# Altium PCB PCB.PcbDoc
Units mm, origin at the board's own origin, x right, y up, seen from the top; angles counter-clockwise.
Board outline 80 x 60 mm, 2 copper layers (Top Layer, Bottom Layer); 43 components, 32 nets, 172 pads, 9 vias.
Unrouted connection lines stored in the file: 20.
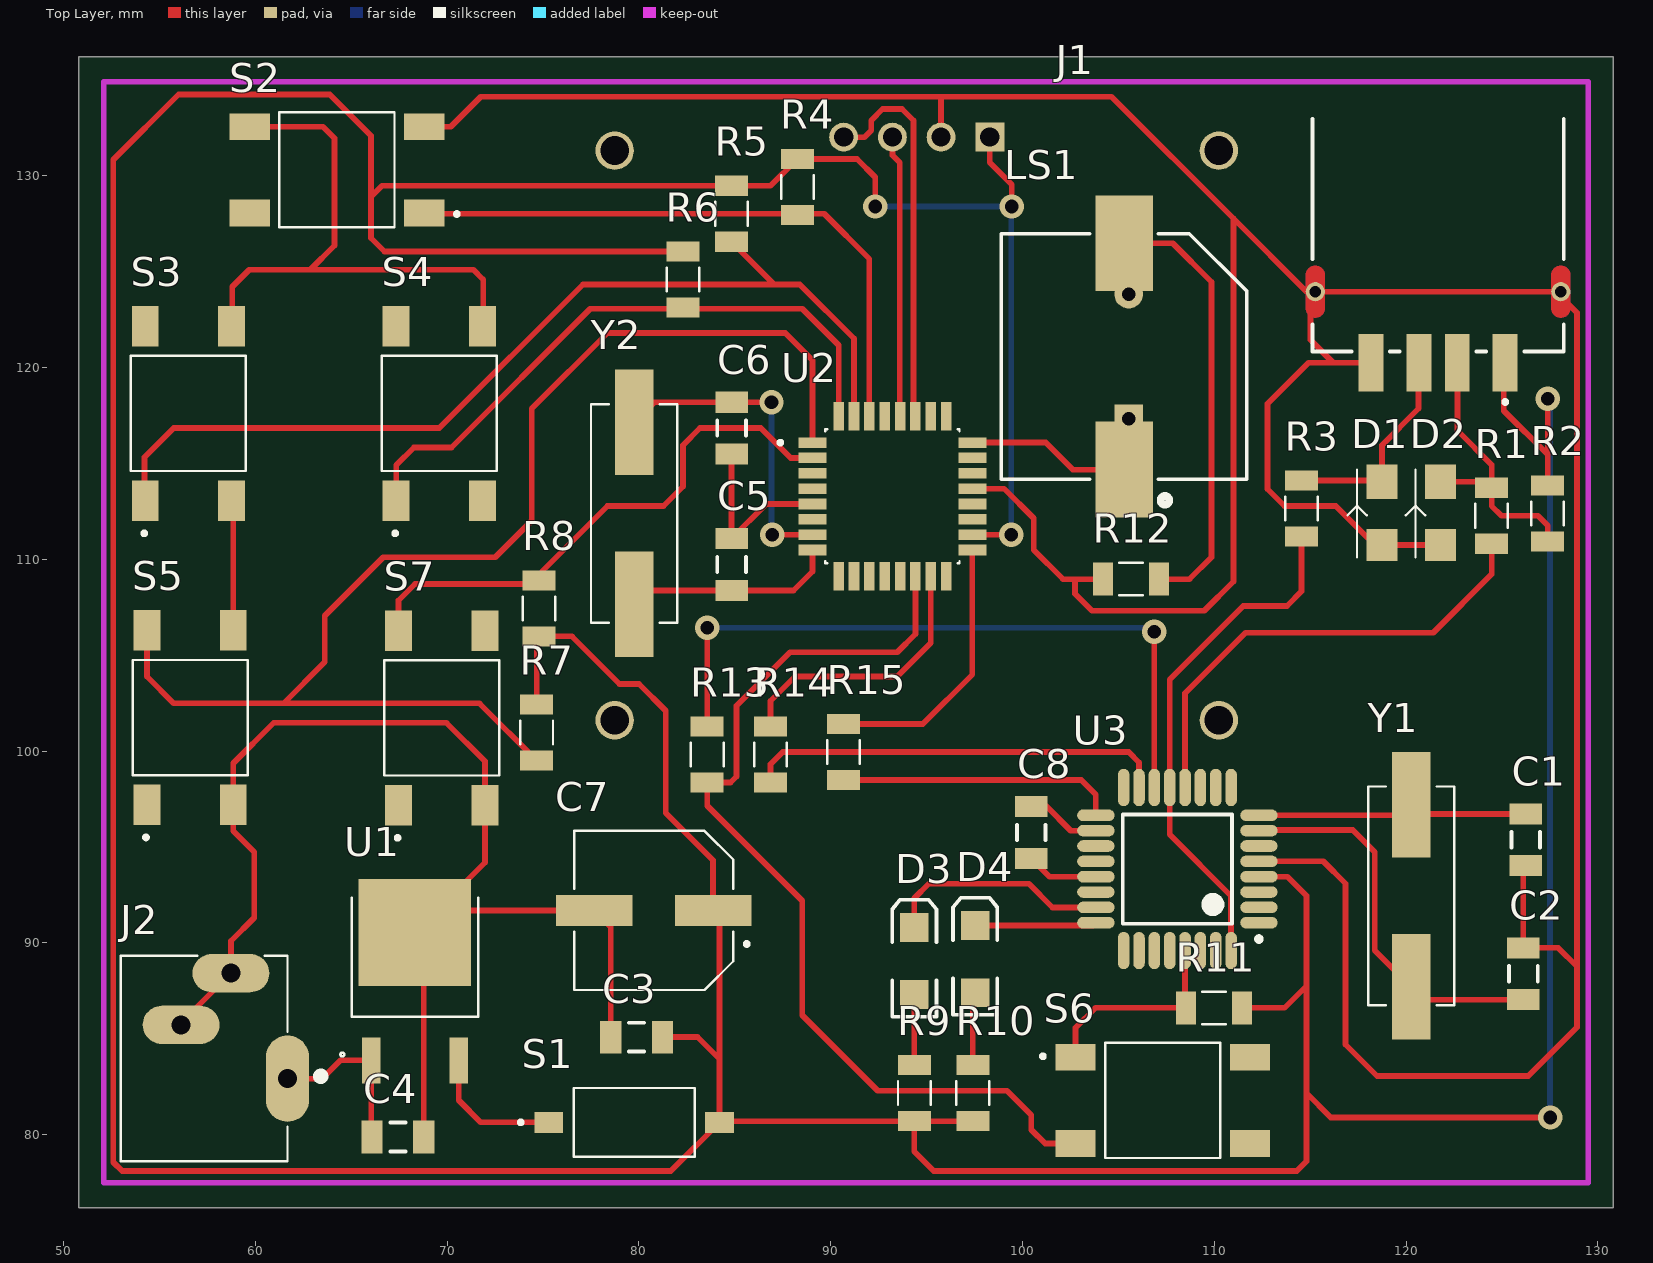
[diagram p0: Top Layer view]
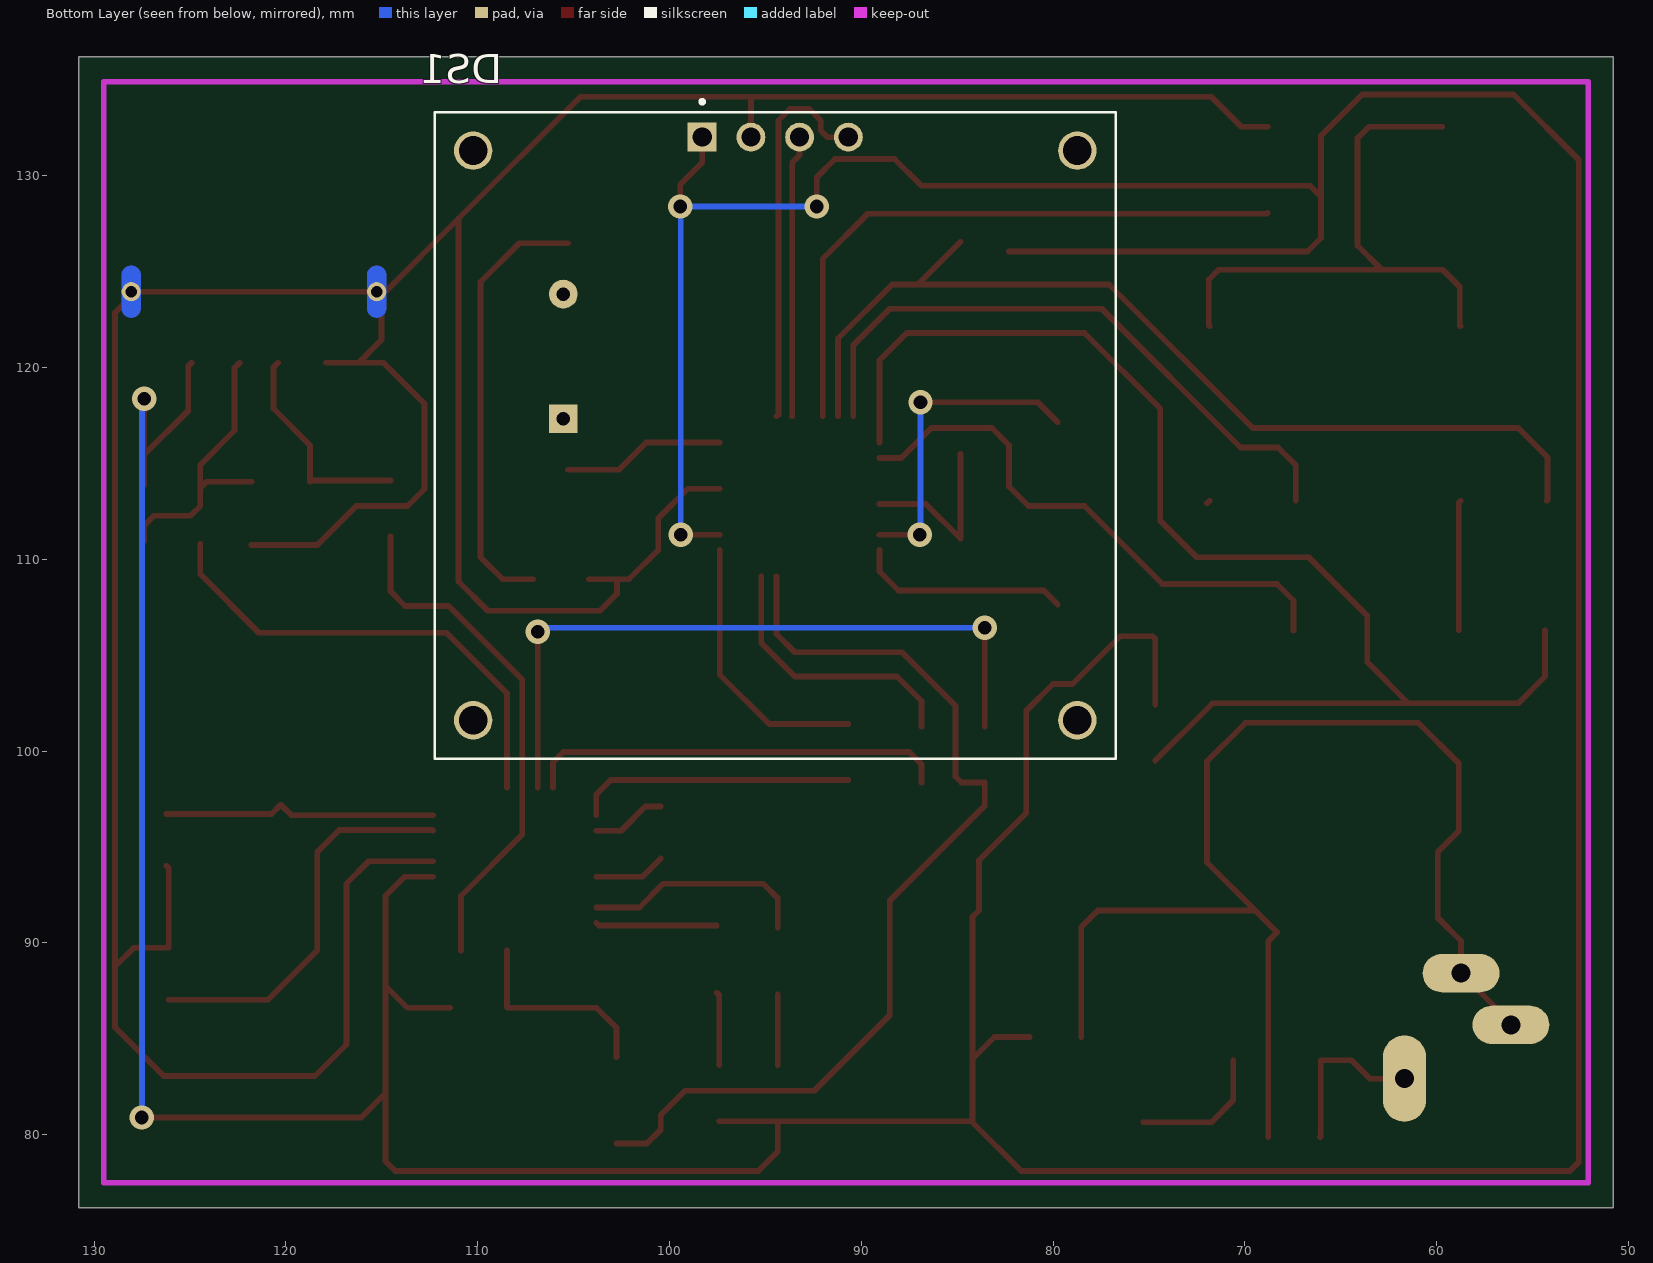
[diagram p1: Bottom Layer view, seen from below]

## Layer stack, top to bottom
Top Solder: solder mask 0.0102, Solder Resist, Dk 3.5
Top Layer: signal copper 0.0356
Dielectric 1: dielectric 0.32, FR-4, Dk 4.8
Bottom Layer: signal copper 0.0356
Bottom Solder: solder mask 0.0102, Solder Resist, Dk 3.5

## Board outline
50.8,76.2 130.8,76.2 130.8,136.2 50.8,136.2

## Design rules (kind name [scope] priority, off if disabled: settings)
Clearance [All] p1: gap=0.2 ignorepadtopadclearanceinfootprint=FALSE
PolygonConnect [All] p1: connectstyle=Relief reliefconductorwidth=0.254 reliefentries=4 polygonreliefangle="90 Angle" airgapwidth=0.254
RoomDefinition Sheet1 [InComponentClass('Components Class 1')] p1: confinementstyle=ConfineIn formatcopy=TRUE lockcomponents=FALSE outline 130.683,136.144 50.927,136.144 50.927,76.2 130.683,76.2
RoutingVias [All] p1: holewidth=0.6 width=1 viastyle="Through Hole" minholewidth=0.711 minwidth=1.27 maxholewidth=0.711 maxwidth=1.27
SolderMaskExpansion [All] p1: expansion=0.102
Width [All] p1: maxlimit=0.3 minlimit=0.3 preferedwidth=0.3
30 further rules are at their usual default settings.

## Classes and differential pairs
component class Sheet1: C1 C2 C3 C4 C5 C6 C7 C8 D1 D2 D3 D4 J1 R1 R2 R3 R4 R5 R6 R7 R8 R9 R10 R11 R13 R14 R15 S1 S2 S3 S4 S5 S6 S7 U2 U3 U? Y1 Y2

## Components (designator, comment, footprint, x,y, rotation, side; value= is the part's Value field where it differs from the comment)
C1 "Cap Semi" C1206 126.238,95.377 r90 top value=22pF
C2 "Cap Semi" C1206 126.111,88.392 r270 top value=22pF
C3 "Cap Semi" C1206 79.883,85.09 r0 top value=0.1uF
C4 "Cap Semi" C1206 67.437,79.883 r180 top value=0.33uF
C5 "Cap Semi" C1206 84.836,109.728 r270 top value=22pF
C6 "Cap Semi" C1206 84.836,116.84 r90 top value=22pF
C7 "EEEFK1J220L" *CAP_EEEFK1J220L 80.772,91.694 r180 top value=4.7uF
C8 "Cap Semi" C1206 100.457,95.758 r90 top value=100nF
D1 "MMSZ3V3T1G" *MMSZ5V6T1G_MMSZ3V3T1G(Primary) 118.745,112.395 r270 top value=3V6
D2 "MMSZ3V3T1G" *MMSZ5V6T1G_MMSZ3V3T1G(Primary) 121.793,112.394 r270 top value=3V6
D3 "LED2" 3.2X1.6X1.1 94.361,89.055 r90 top
D4 "LED2" 3.2X1.6X1.1 97.536,89.154 r90 top
DS1 "OLED_128X64_1.3_I2C" *LCD_OLED_128X64_1.3_I2C 94.488,116.459 r180 bottom
J1 "USB" *GCT_USB1046-GF-0190-L-B-A_REVB4_USB1046-GF-0190-L-B-A_REVB4(Primary) 121.666,123.952 r180 top
J2 "PJ-006A" *CUI_PJ-006A 61.684,82.925 r270 top
LS1 "Buzzer" ABSM-1574 105.297,114.675 r90 top
R1 "1-2176343-4" *RESC3115X65N 124.46,112.268 r90 top value=68
R2 "1-2176343-4" *RESC3115X65N 127.381,112.395 r90 top value=2K2
R3 "1-2176343-4" *RESC3115X65N 114.554,112.649 r90 top value=68
R4 "1-2176343-4" *RESC3115X65N 88.265,129.413 r270 top value=10K
R5 "1-2176343-4" *RESC3115X65N 84.836,128.016 r270 top value=10K
R6 "1-2176343-4" *RESC3115X65N 82.296,124.587 r270 top value=10K
R7 "1-2176343-4" *RESC3115X65N 74.676,100.965 r270 top value=10K
R8 "1-2176343-4" *RESC3115X65N 74.803,107.442 r90 top value=10K
R9 "1-2176343-4" *RESC3115X65N 94.361,82.169 r270 top value=10K
R10 "1-2176343-4" *RESC3115X65N 97.409,82.169 r270 top value=10K
R11 "1-2176343-4" *RESC3115X65N 109.982,86.614 r0 top value=10K
R12 "1-2176343-4" *RESC3115X65N 105.664,108.966 r0 top value=10K
R13 "1-2176343-4" *RESC3115X65N 83.566,99.822 r270 top value=10K
R14 "1-2176343-4" *RESC3115X65N 86.868,99.822 r90 top value=10K
R15 "1-2176343-4" *RESC3115X65N 90.678,99.949 r90 top value=10K
S1 "KAE01SGGT" *SW_KAE01SGGT 79.756,80.645 r0 top
S2 "3-1437565-0" *SW_3-1437565-0 64.262,130.302 r180 top
S3 "3-1437565-0" *SW_3-1437565-0 56.515,117.602 r90 top
S4 "3-1437565-0" *SW_3-1437565-0 69.596,117.602 r90 top
S5 "3-1437565-0" *SW_3-1437565-0 56.606,101.749 r90 top
S6 "3-1437565-0" *SW_3-1437565-0 107.315,81.788 r0 top
S7 "3-1437565-0" *SW_3-1437565-0 69.723,101.727 r90 top
U1 "L7805CDT" *VREG_L7805CDT 68.326,88.081 r0 top
U2 "ATMEGA328P-AU" *QFP80P900X900X120-32N 93.218,113.284 r0 top
U3 "ATmega8-16AU" 32A_M 108.077,93.853 r180 top
Y1 "CRYSTAL" *XTAL_CAA-12.000-20-3050-X-R 120.269,92.456 r270 top value=12MHz
Y2 "CRYSTAL" *XTAL_CAA-12.000-20-3050-X-R 79.756,112.395 r90 top value=12MHz

## Footprints (in the part's own frame and the unit in brackets; to place one, negate y for a bottom-side part, rotate by r counter-clockwise, add the part's x,y. Pads: shape width x height; smd on the part's side, far side on the other; paste and mask are expansions set on the pad)
3.2X1.6X1.1 [mm] "SMT LED; 2 Flat Leads"
  rect 1.5x1.5 smd: 1(-1.75,0) 2(1.75,0)
  silkscreen extent -2.9,-1.15 3.2,1.15
32A_M [mm] "Thin QFP, 32-Leads, Body 7x7mm, Pitch 0.8mm, IPC Low Density"
  oval 1.95x0.6 smd: 1(-4.25,2.8) 2(-4.25,2) 3(-4.25,1.2) 4(-4.25,0.4) 5(-4.25,-0.4) 6(-4.25,-1.2) 7(-4.25,-2) 8(-4.25,-2.8) 17(4.25,-2.8) 18(4.25,-2) 19(4.25,-1.2) 20(4.25,-0.4) 21(4.25,0.4) 22(4.25,1.2) 23(4.25,2) 24(4.25,2.8)
  oval 0.6x1.95 smd: 9(-2.8,-4.25) 10(-2,-4.25) 11(-1.2,-4.25) 12(-0.4,-4.25) 13(0.4,-4.25) 14(1.2,-4.25) 15(2,-4.25) 16(2.8,-4.25) 25(2.8,4.25) 26(2,4.25) 27(1.2,4.25) 28(0.4,4.25) 29(-0.4,4.25) 30(-1.2,4.25) 31(-2,4.25) 32(-2.8,4.25)
  silkscreen extent -4.38,-2.85 2.85,3.77, body extent -3.5,-3.5 3.5,3.5, height 1.2
*CAP_EEEFK1J220L [mm]
  rect 4x1.6 smd: 1(-3.1,0) 2(3.1,0)
  silkscreen extent -4.95,-4.15 4.15,4.15
*CUI_PJ-006A [mm]
  oval 4.5x2.25 hole 1: 1(0,0)
  oval 2x4 hole 1: 2(-5.5,-2.95) 3(-2.8,-5.55)
  silkscreen extent -6.4,-8.7 4.3,1.93
*GCT_USB1046-GF-0190-L-B-A_REVB4_USB1046-GF-0190-L-B-A_REVB4(Primary) [mm]
  rect 1.3x3 smd: 1(-3.5,3.7) 2(-1,3.7) 3(1,3.7) 4(3.5,3.7)
  round 1 hole 0.6: SH1(-6.4,0) SH2(6.4,0)
  Top Layer region: 6.9,0.85 6.9,-0.85 6.899,-0.876 6.897,-0.902 6.894,-0.928 6.889,-0.954 6.883,-0.979 6.876,-1.005 6.867,-1.029 6.857,-1.053 6.846,-1.077 6.833,-1.1 6.819,-1.122 6.805,-1.144 6.789,-1.165 6.772,-1.185 6.754,-1.204 6.735,-1.222 6.715,-1.239 6.694,-1.255 6.672,-1.269 6.65,-1.283 6.627,-1.295 6.603,-1.307 6.579,-1.317 6.555,-1.326 6.529,-1.333 6.504,-1.339 6.478,-1.344 6.452,-1.347 6.426,-1.349 6.4,-1.35 6.374,-1.349 6.348,-1.347 6.322,-1.344 6.296,-1.339 6.271,-1.333 6.245,-1.326 6.221,-1.317 6.197,-1.307 6.173,-1.295 6.15,-1.283 6.128,-1.269 6.106,-1.255 6.085,-1.239 6.065,-1.222 6.046,-1.204 6.028,-1.185 6.011,-1.165 5.995,-1.144 5.981,-1.122 5.967,-1.1 5.954,-1.077 5.943,-1.053 5.933,-1.029 5.924,-1.005 5.917,-0.979 5.911,-0.954 5.906,-0.928 5.903,-0.902 5.901,-0.876 5.9,-0.85 5.9,0.85 5.901,0.876 5.903,0.902 5.906,0.928 5.911,0.954 5.917,0.979 5.924,1.005 5.933,1.029 5.943,1.053 5.954,1.077 5.967,1.1 5.981,1.122 5.995,1.144 6.011,1.165 6.028,1.185 6.046,1.204 6.065,1.222 6.085,1.239 6.106,1.255 6.128,1.269 6.15,1.283 6.173,1.295 6.197,1.307 6.221,1.317 6.245,1.326 6.271,1.333 6.296,1.339 6.322,1.344 6.348,1.347 6.374,1.349 6.4,1.35 6.426,1.349 6.452,1.347 6.478,1.344 6.504,1.339 6.529,1.333 6.555,1.326 6.579,1.317 6.603,1.307 6.627,1.295 6.65,1.283 6.672,1.269 6.694,1.255 6.715,1.239 6.735,1.222 6.754,1.204 6.772,1.185 6.789,1.165 6.805,1.144 6.819,1.122 6.833,1.1 6.846,1.077 6.857,1.053 6.867,1.029 6.876,1.005 6.883,0.979 6.889,0.954 6.894,0.928 6.897,0.902 6.899,0.876 6.9,0.85
  Top Layer region: -5.9,0.85 -5.9,-0.85 -5.901,-0.876 -5.903,-0.902 -5.906,-0.928 -5.911,-0.954 -5.917,-0.979 -5.924,-1.005 -5.933,-1.029 -5.943,-1.053 -5.954,-1.077 -5.967,-1.1 -5.981,-1.122 -5.995,-1.144 -6.011,-1.165 -6.028,-1.185 -6.046,-1.204 -6.065,-1.222 -6.085,-1.239 -6.106,-1.255 -6.128,-1.269 -6.15,-1.283 -6.173,-1.295 -6.197,-1.307 -6.221,-1.317 -6.245,-1.326 -6.271,-1.333 -6.296,-1.339 -6.322,-1.344 -6.348,-1.347 -6.374,-1.349 -6.4,-1.35 -6.426,-1.349 -6.452,-1.347 -6.478,-1.344 -6.504,-1.339 -6.529,-1.333 -6.555,-1.326 -6.579,-1.317 -6.603,-1.307 -6.627,-1.295 -6.65,-1.283 -6.672,-1.269 -6.694,-1.255 -6.715,-1.239 -6.735,-1.222 -6.754,-1.204 -6.772,-1.185 -6.789,-1.165 -6.805,-1.144 -6.819,-1.122 -6.833,-1.1 -6.846,-1.077 -6.857,-1.053 -6.867,-1.029 -6.876,-1.005 -6.883,-0.979 -6.889,-0.954 -6.894,-0.928 -6.897,-0.902 -6.899,-0.876 -6.9,-0.85 -6.9,0.85 -6.899,0.876 -6.897,0.902 -6.894,0.928 -6.889,0.954 -6.883,0.979 -6.876,1.005 -6.867,1.029 -6.857,1.053 -6.846,1.077 -6.833,1.1 -6.819,1.122 -6.805,1.144 -6.789,1.165 -6.772,1.185 -6.754,1.204 -6.735,1.222 -6.715,1.239 -6.694,1.255 -6.672,1.269 -6.65,1.283 -6.627,1.295 -6.603,1.307 -6.579,1.317 -6.555,1.326 -6.529,1.333 -6.504,1.339 -6.478,1.344 -6.452,1.347 -6.426,1.349 -6.4,1.35 -6.374,1.349 -6.348,1.347 -6.322,1.344 -6.296,1.339 -6.271,1.333 -6.245,1.326 -6.221,1.317 -6.197,1.307 -6.173,1.295 -6.15,1.283 -6.128,1.269 -6.106,1.255 -6.085,1.239 -6.065,1.222 -6.046,1.204 -6.028,1.185 -6.011,1.165 -5.995,1.144 -5.981,1.122 -5.967,1.1 -5.954,1.077 -5.943,1.053 -5.933,1.029 -5.924,1.005 -5.917,0.979 -5.911,0.954 -5.906,0.928 -5.903,0.902 -5.901,0.876 -5.9,0.85
  Bottom Layer region: 5.9,0.85 5.9,-0.85 5.901,-0.876 5.903,-0.902 5.906,-0.928 5.911,-0.954 5.917,-0.979 5.924,-1.005 5.933,-1.029 5.943,-1.053 5.954,-1.077 5.967,-1.1 5.981,-1.122 5.995,-1.144 6.011,-1.165 6.028,-1.185 6.046,-1.204 6.065,-1.222 6.085,-1.239 6.106,-1.255 6.128,-1.269 6.15,-1.283 6.173,-1.295 6.197,-1.307 6.221,-1.317 6.245,-1.326 6.271,-1.333 6.296,-1.339 6.322,-1.344 6.348,-1.347 6.374,-1.349 6.4,-1.35 6.426,-1.349 6.452,-1.347 6.478,-1.344 6.504,-1.339 6.529,-1.333 6.555,-1.326 6.579,-1.317 6.603,-1.307 6.627,-1.295 6.65,-1.283 6.672,-1.269 6.694,-1.255 6.715,-1.239 6.735,-1.222 6.754,-1.204 6.772,-1.185 6.789,-1.165 6.805,-1.144 6.819,-1.122 6.833,-1.1 6.846,-1.077 6.857,-1.053 6.867,-1.029 6.876,-1.005 6.883,-0.979 6.889,-0.954 6.894,-0.928 6.897,-0.902 6.899,-0.876 6.9,-0.85 6.9,0.85 6.899,0.876 6.897,0.902 6.894,0.928 6.889,0.954 6.883,0.979 6.876,1.005 6.867,1.029 6.857,1.053 6.846,1.077 6.833,1.1 6.819,1.122 6.805,1.144 6.789,1.165 6.772,1.185 6.754,1.204 6.735,1.222 6.715,1.239 6.694,1.255 6.672,1.269 6.65,1.283 6.627,1.295 6.603,1.307 6.579,1.317 6.555,1.326 6.529,1.333 6.504,1.339 6.478,1.344 6.452,1.347 6.426,1.349 6.4,1.35 6.374,1.349 6.348,1.347 6.322,1.344 6.296,1.339 6.271,1.333 6.245,1.326 6.221,1.317 6.197,1.307 6.173,1.295 6.15,1.283 6.128,1.269 6.106,1.255 6.085,1.239 6.065,1.222 6.046,1.204 6.028,1.185 6.011,1.165 5.995,1.144 5.981,1.122 5.967,1.1 5.954,1.077 5.943,1.053 5.933,1.029 5.924,1.005 5.917,0.979 5.911,0.954 5.906,0.928 5.903,0.902 5.901,0.876 5.9,0.85
  Bottom Layer region: -6.9,0.85 -6.9,-0.85 -6.899,-0.876 -6.897,-0.902 -6.894,-0.928 -6.889,-0.954 -6.883,-0.979 -6.876,-1.005 -6.867,-1.029 -6.857,-1.053 -6.846,-1.077 -6.833,-1.1 -6.819,-1.122 -6.805,-1.144 -6.789,-1.165 -6.772,-1.185 -6.754,-1.204 -6.735,-1.222 -6.715,-1.239 -6.694,-1.255 -6.672,-1.269 -6.65,-1.283 -6.627,-1.295 -6.603,-1.307 -6.579,-1.317 -6.555,-1.326 -6.529,-1.333 -6.504,-1.339 -6.478,-1.344 -6.452,-1.347 -6.426,-1.349 -6.4,-1.35 -6.374,-1.349 -6.348,-1.347 -6.322,-1.344 -6.296,-1.339 -6.271,-1.333 -6.245,-1.326 -6.221,-1.317 -6.197,-1.307 -6.173,-1.295 -6.15,-1.283 -6.128,-1.269 -6.106,-1.255 -6.085,-1.239 -6.065,-1.222 -6.046,-1.204 -6.028,-1.185 -6.011,-1.165 -5.995,-1.144 -5.981,-1.122 -5.967,-1.1 -5.954,-1.077 -5.943,-1.053 -5.933,-1.029 -5.924,-1.005 -5.917,-0.979 -5.911,-0.954 -5.906,-0.928 -5.903,-0.902 -5.901,-0.876 -5.9,-0.85 -5.9,0.85 -5.901,0.876 -5.903,0.902 -5.906,0.928 -5.911,0.954 -5.917,0.979 -5.924,1.005 -5.933,1.029 -5.943,1.053 -5.954,1.077 -5.967,1.1 -5.981,1.122 -5.995,1.144 -6.011,1.165 -6.028,1.185 -6.046,1.204 -6.065,1.222 -6.085,1.239 -6.106,1.255 -6.128,1.269 -6.15,1.283 -6.173,1.295 -6.197,1.307 -6.221,1.317 -6.245,1.326 -6.271,1.333 -6.296,1.339 -6.322,1.344 -6.348,1.347 -6.374,1.349 -6.4,1.35 -6.426,1.349 -6.452,1.347 -6.478,1.344 -6.504,1.339 -6.529,1.333 -6.555,1.326 -6.579,1.317 -6.603,1.307 -6.627,1.295 -6.65,1.283 -6.672,1.269 -6.694,1.255 -6.715,1.239 -6.735,1.222 -6.754,1.204 -6.772,1.185 -6.789,1.165 -6.805,1.144 -6.819,1.122 -6.833,1.1 -6.846,1.077 -6.857,1.053 -6.867,1.029 -6.876,1.005 -6.883,0.979 -6.889,0.954 -6.894,0.928 -6.897,0.902 -6.899,0.876 -6.9,0.85
  silkscreen extent -6.55,-9 6.55,5.85
*LCD_OLED_128X64_1.3_I2C [mm]
  rect 1.508x1.508 hole 1: 1(-3.81,15.55)
  round 1.508 hole 1: 2(-1.27,15.55) 3(1.27,15.55) 4(3.81,15.55)
  round 2 hole 1.5 unplated: None(-15.75,-14.85) None(-15.75,14.85) None(15.75,-14.85) None(15.75,14.85)
  silkscreen extent -17.75,-16.85 17.75,17.5
*MMSZ5V6T1G_MMSZ3V3T1G(Primary) [mm]
  rect 1.68x1.6 smd: A(1.65,0)
  rect 1.8x1.6 smd: K(-1.65,0)
  silkscreen extent -2.3,-1.8 2.3,-0.8
*QFP80P900X900X120-32N [mm]
  rect 1.47x0.55 smd: 1(-4.17,2.8) 2(-4.17,2) 3(-4.17,1.2) 4(-4.17,0.4) 5(-4.17,-0.4) 6(-4.17,-1.2) 7(-4.17,-2) 8(-4.17,-2.8) 17(4.17,-2.8) 18(4.17,-2) 19(4.17,-1.2) 20(4.17,-0.4) 21(4.17,0.4) 22(4.17,1.2) 23(4.17,2) 24(4.17,2.8)
  rect 0.55x1.47 smd: 9(-2.8,-4.17) 10(-2,-4.17) 11(-1.2,-4.17) 12(-0.4,-4.17) 13(0.4,-4.17) 14(1.2,-4.17) 15(2,-4.17) 16(2.8,-4.17) 25(2.8,4.17) 26(2,4.17) 27(1.2,4.17) 28(0.4,4.17) 29(-0.4,4.17) 30(-1.2,4.17) 31(-2,4.17) 32(-2.8,4.17)
  silkscreen extent -5.94,-3.5 3.5,3.5
*RESC3115X65N [mm]
  rect 1.05x1.72 smd: 1(-1.46,0) 2(1.46,0)
  silkscreen extent -0.62,-0.85 0.62,0.85
*SW_3-1437565-0 [mm]
  rect 2.1x1.4 smd: 1(-4.55,2.25) 2(4.55,2.25) 3(-4.55,-2.25) 4(4.55,-2.25)
  silkscreen extent -6.35,-3 3,3
*SW_KAE01SGGT [mm]
  rect 1.5x1.1 smd: 1(-4.45,0) 2(4.45,0)
  silkscreen extent -6.01,-1.79 3.15,1.79
*VREG_L7805CDT [mm]
  rect 0.98x2.4 smd: 1(-2.28,-4.2) 2(2.28,-4.2)
  rect 5.86x5.57 smd: 3(0,2.47)
  silkscreen extent -3.89,-4 3.3,4.27
*XTAL_CAA-12.000-20-3050-X-R [mm]
  rect 5.5x2 smd: 1(-4.75,0) 2(4.75,0)
  silkscreen extent -5.7,-2.25 5.7,2.25
ABSM-1574 [mm] "Magnetic Transducer Buzzer"
  rect 5x3 smd: 1(0,0) 2(11.8,0)
  rect 1.5x1.5 hole 0.7: 1A(2.65,-0.24)
  round 1.5 hole 0.7: 2A(9.15,-0.24)
  silkscreen extent -1.83,-6.4 12.3,6.4
C1206 [mm] "Chip Capacitor, Body 3.2x1.6mm, IPC High Density"
  rect 1.1x1.7 smd: 1(-1.35,0) 2(1.35,0)
  silkscreen extent -0.4,-0.75 0.4,0.75, body extent -1.7,-0.9 1.7,0.9, height 1.3

## Part data
C1 C2 C3 C4 C5 C6 C8: "Capacitor (Semiconductor SIM Model)", LatestRevisionDate=29-May-2009, LatestRevisionNote="IPC-7351 Footprint Added.", PackageDescription="Chip Capacitor", PackageReference=C1206, Published=8-Jun-2000, Publisher="Altium Limited"
C7: "CAP ALUM 22UF 20% 63V SMD", Package="RADIAL-2 Panasonic", Availability="In Stock", Check_prices=https://www.snapeda.com/parts/EEEFK1J220L/Panasonic/view-part/?ref=eda, MF=Panasonic, MP=EEEFK1J220L, Price=None, SnapEDA_Link=https://www.snapeda.com/parts/EEEFK1J220L/Panasonic/view-part/?ref=snap
D1 D2: "Zener Diode 3.3 V 500 mW ±5% Surface Mount SOD-123", Package="SOD-123-2 ON Semiconductor", Availability="In Stock", Check_prices=https://www.snapeda.com/parts/MMSZ3V3T1G/Onsemi/view-part/?ref=eda, MF="ON Semiconductor", MP=MMSZ3V3T1G, Price=None, SnapEDA_Link=https://www.snapeda.com/parts/MMSZ3V3T1G/Onsemi/view-part/?ref=snap
D3 D4: "Typical RED, GREEN, YELLOW, AMBER GaAs LED", LatestRevisionDate=17-Jul-2002, LatestRevisionNote="Re-released for DXP Platform.", PackageDescription="SM LED; 2 Flat Leads", PackageReference=3.2X1.6X1.1, PackageVersion=Feb-2002, Published=8-Jun-2000, Publisher="Altium Limited"
DS1: "Non-Touch Graphic LCD Display Module Transmissive White OLED, Monochrome I2C 1.3 (33.02mm) 128 x 64", Package=None, Availability="Not in stock", Check_prices=https://www.snapeda.com/parts/OLED%20128x64%201.3%22%20I2C/UNIVERSAL-SOLDER+Electronics+Ltd/view-part/?ref=eda, MF="UNIVERSAL-SOLDER Electronics Ltd", MP="OLED 128x64 1.3&quot; I2C", Price=None, SnapEDA_Link=https://www.snapeda.com/parts/OLED%20128x64%201.3%22%20I2C/UNIVERSAL-SOLDER+Electronics+Ltd/view-part/?ref=snap
J1: library part USB1046-GF-0190-L-B-A_REVB4, "USB-A (USB TYPE-A) USB 2.0 Receptacle Connector 4 Position Surface Mount, Through Hole", Package=None, Availability="In Stock", Check_prices=https://www.snapeda.com/parts/USB1046-GF-0190-L-B-A/Global+Connector+Technology/view-part/?ref=eda, MF="Global Connector Technology", MP=USB1046-GF-0190-L-B-A, Price=None, SnapEDA_Link=https://www.snapeda.com/parts/USB1046-GF-0190-L-B-A/Global+Connector+Technology/view-part/?ref=snap
J2: "2.0 x 6.3 mm, 2.0 A, Vertical, Through Hole, Dc Power Jack Connector", Package=None, Availability="In Stock", Check_prices=https://www.snapeda.com/parts/PJ-006A/Same+Sky/view-part/?ref=eda, MF="Same Sky", MP=PJ-006A, Price=None, SnapEDA_Link=https://www.snapeda.com/parts/PJ-006A/Same+Sky/view-part/?ref=snap
LS1: "Magnetic Transducer Buzzer", ComponentLink1Description="Manufacturer Link", ComponentLink1URL=http://www.megastar.com/linecard/buzzmode/index.php, DatasheetVersion=17-Dec-2003, LatestRevisionDate=17-Dec-2003, LatestRevisionNote="Schematic revised, PCB Footprint replaced.", PackageDescription="Magnetic Transducer Buzzer", PackageReference=ABSM-1574, Published=24-Mar-1999, Publisher="Altium Limited"
R1 R2 R3 R4 R5 R6 R7 R8 R9 R10 R11 R12 R13 R14 R15: library part CRGCQ1206F120R, "Fixed Resistor CRGCQ 1206 120R 1%", Package="3115 TE Connectivity", Availability="In Stock", Check_prices=https://www.snapeda.com/parts/CRGCQ1206F120R/TE+Connectivity/view-part/?ref=eda, MF="TE Connectivity", MP=CRGCQ1206F120R, Price=None, SnapEDA_Link=https://www.snapeda.com/parts/CRGCQ1206F120R/TE+Connectivity/view-part/?ref=snap
S1: "Dip Switch SPST 1 Position Surface Mount Slide (Standard) Actuator 25mA 24VDC", Package=None, Availability="In Stock", Check_prices=https://www.snapeda.com/parts/KAE01SGGT/E-Switch/view-part/?ref=eda, MF=E-Switch, MP=KAE01SGGT, Price=None, SnapEDA_Link=https://www.snapeda.com/parts/KAE01SGGT/E-Switch/view-part/?ref=snap
S2 S3 S4 S5 S6 S7: "Switch Tactile OFF (ON) SPST Round Button Gull Wing 0.05A 24VDC 1VA 9.18N SMD T/R", Package=None, Availability="In Stock", Check_prices=https://www.snapeda.com/parts/314375650/TE+Connectivity/view-part/?ref=eda, MF="TE Connectivity", MP=314375650, Price=None, SnapEDA_Link=https://www.snapeda.com/parts/314375650/TE+Connectivity/view-part/?ref=snap
U1: "Linear Voltage Regulator IC Positive Fixed 1 Output  1.5A DPAK", Package="TO-252-3 STMicroelectronics", Availability="In Stock", Check_prices=https://www.snapeda.com/parts/L7805CDT/STMicroelectronics/view-part/?ref=eda, MF=STMicroelectronics, MP=L7805CDT, Price=None, SnapEDA_Link=https://www.snapeda.com/parts/L7805CDT/STMicroelectronics/view-part/?ref=snap
U2: "MCU 8-bit - AVR ATmega Family ATmega328 Series Microcontrollers - 20 MHz - 32 KB - 2 KB - 32 Pins.", Package="TQFP-32 Microchip", Check_prices=https://www.snapeda.com/parts/ATMEGA328P-AU/Microchip+Technology/view-part/?ref=eda, DigiKey_Part_Number=ATMEGA328P-AU-ND, MF="MICROCHIP TECH.", MP=ATMEGA328P-AU, SnapEDA_Link=https://www.snapeda.com/parts/ATMEGA328P-AU/Microchip+Technology/view-part/?ref=snap
U3: "8-bit AVR Microcontroller, 4.5-5.5V, 16MHz, 8KB Flash, 512 Bytes EEPROM, 1KB SRAM, 32-pin TQFP, Industrial Grade (-40°C to 85°C)", Code_JEDEC=MS-026-ABA, ComponentLink1Description="Manufacturer URL", ComponentLink1URL=http://www.atmel.com/, ComponentLink2Description=ATmega8(L), ComponentLink2URL=http://www.atmel.com/dyn/resources/prod_documents/doc2486.pdf, ComponentLink3Description="ATmega8(L) Summary", ComponentLink3URL=http://www.atmel.com/dyn/resources/prod_documents/2486S.pdf, DatasheetVersion="revZ, Feb-2011", PackageDescription="32-Lead, 7x7x1.0 mm Body, 0.8mm Lead Pitch, Thin Profile Plastic Quad Flat Package (TQFP)", PackageReference=32A, PackageVersion="revC, Oct-2010"
Y1 Y2: library part CAA-12.000-20-3050-X-R, "12 MHz ±30ppm Crystal 20pF 50 Ohms HC-49/US", Package="SMD-4 AKER", Availability="In Stock", Check_prices=https://www.snapeda.com/parts/CAA-12.000-20-3050-X-R/Aker/view-part/?ref=eda, MF="Aker Technology Corp", MP=CAA-12.000-20-3050-X-R, Price=None, SnapEDA_Link=https://www.snapeda.com/parts/CAA-12.000-20-3050-X-R/Aker/view-part/?ref=snap

## Via types
v1: diameter 1.27, hole 0.711, Top Layer to Bottom Layer, 9 vias

## Nets (pads, with @x,y where several pads share a name; then routed paths per layer and width w, separated by ;. In a path a pad name is that pad's centre, name@x,y a point inside that pad or via, vN(x,y) a via of type N, cw(c..) or ccw(c..) an arc to the next point about the centre after c; other vN are vias at no path point)
5V: C3.2 C7.1 C8.2 DS1.1 J1.1 R2.2 R4.1 R5.1 R6.1 R7.1 R8.1 R9.2 R10.2 R11.2 S1.2 U2.4 U2.6 U2.18 U3.4 U3.6 U3.18 | length 341.4
  Top Layer w0.3: R7.1 74.676,105.855 R8.1 76.517,105.982 78.994,103.505 80.01,103.505 81.407,102.108 81.407,96.774 83.872,94.309 C7.1 84.206,91.36 84.206,83.942 ; C3.2 83.058,85.09 84.206,83.942 ; R6.1 66.739,126.047 66.04,126.746 66.04,128.905 ; v1(92.329,128.397) 92.329,129.921 91.377,130.873 R4.1 86.868,129.476 R5.1 66.611,129.476 66.04,128.905 ; U2.18 v1(99.409,111.284) ; R10.2 R9.2 ; DS1.1 98.298,130.683 99.441,129.54 v1(99.441,128.397) ; C8.2 101.266,97.108 102.521,95.853 U3.18 ; R11.2 113.665,86.614 114.808,87.757 ; U3.4 113.811,93.453 114.808,92.456 114.808,87.757 ; J1.1@124.912,120.252 125.095,120.069 125.095,117.744 127.381,115.458 ; R2.2 127.381,115.458 ; v1(127.381,118.364) 127.381,115.458 ; v1(127.508,80.899) 116.078,80.899 114.808,82.169 ; 66.04,128.905 66.04,132.08 63.881,134.239 56.007,134.239 52.6,130.832 52.6,78.569 53.064,78.105 81.666,78.105 S1.2 ; S1.2 84.27,80.709 R9.2 ; S1.2 84.206,83.942 ; R9.2 94.361,79.121 95.377,78.105 114.3,78.105 114.808,78.613 114.808,82.169 ; 114.808,82.169 114.808,87.757
  Bottom Layer w0.3: v1(92.329,128.397) v1(99.441,128.397) 99.409,128.365 v1(99.409,111.284) ; v1(127.381,118.364) 127.508,118.237 v1(127.508,80.899)
12V: C4.2 J2.1 U1.1 | length 8.8
  Top Layer w0.3: J2.1 63.494,82.925 64.45,83.881 U1.1 66.046,79.924 C4.2
GND: C1.1 C2.1 C3.1 C4.1 C5.1 C6.1 C7.2 C8.1 D1.A D2.A DS1.2 J1.4 J1.SH1 J1.SH2 J2.2 J2.3 R12.1 S2.3 S2.4 S3.3 S3.4 S4.3 S4.4 S5.3 S5.4 S7.3 S7.4 U1.3 U2.3 U2.5 U2.21 U3.3 U3.5 U3.21 | length 320.6
  Top Layer w0.3: J2.3 56.134,85.825 J2.2 58.734,90.103 59.944,91.313 59.944,94.742 58.856,95.83 S5.3 58.856,99.369 60.96,101.473 69.977,101.473 71.973,99.477 S7.3 71.973,94.198 U1.3@69.469,91.694 ; S3.3 58.856,112.961 S5.4 ; S3.4 58.801,122.188 58.801,124.206 59.69,125.095 62.865,125.095 ; S2.4 63.536,132.552 64.135,131.953 64.135,126.365 62.865,125.095 ; C4.1 68.787,90.09 U1.3 U1.3@69.469,91.694 ; S2.3 70.195,132.552 71.755,134.112 95.758,134.112 ; S4.3 S4.3@71.973,112.925 ; S4.4 71.882,122.188 71.882,124.587 71.374,125.095 62.865,125.095 ; C3.1 78.533,90.833 C7.2 U1.3@69.469,91.694 ; C6.1 C5.1 86.642,112.884 U2.5 ; DS1.2 95.758,134.112 ; U2.21 99.041,113.684 100.584,112.141 100.584,110.49 102.108,108.966 102.743,108.966 ; C8.1 101.412,93.453 U3.21 ; R12.1 102.743,108.966 ; U3.5 115.678,94.253 116.84,93.091 116.84,84.709 118.491,83.058 126.365,83.058 128.905,85.598 128.905,88.773 ; J1.4@117.912,120.252 116.205,120.252 ; D2.A D2.A D1.A 118.363,110.745 116.332,112.776 113.665,112.776 112.776,113.665 112.776,118.11 114.918,120.252 116.205,120.252 ; C1.1 126.111,93.9 C2.1 127.936,89.742 128.905,88.773 ; J1.SH1 J1.SH1@127.812,123.952 ; 95.758,134.112 104.648,134.112 110.998,127.762 ; 102.743,108.966 102.743,108.204 103.632,107.315 109.474,107.315 110.998,108.839 110.998,127.762 ; 110.998,127.762 114.808,123.952 J1.SH2@115.012,123.952 ; J1.SH2@115.012,123.952 115.012,121.445 116.205,120.252 ; J1.SH2@115.012,123.952 J1.SH2 J1.SH1@127.812,123.952 ; J1.SH1@127.812,123.952 128.905,122.859 128.905,88.773
LCD_SCK: DS1.3 U2.28 | length 14.7
  Top Layer w0.3: DS1.3 93.218,131.064 93.599,130.683 93.599,117.473 U2.28
LCD_SDA: DS1.4 U2.27 | length 20.3
  Top Layer w0.3: DS1.4 91.765,132.009 92.114,132.358 92.114,132.881 92.71,133.477 93.726,133.477 94.322,132.881 94.322,117.55 U2.27
NetC1_2: C1.2 U3.8 Y1.1 | length 14.3
  Top Layer w0.3: U3.8 119.716,96.653 Y1.1 120.748,96.727 C1.2
NetC2_2: C2.2 U3.7 Y1.2 | length 20.5
  Top Layer w0.3: U3.7 112.359,95.885 117.221,95.885 118.364,94.742 118.364,89.611 Y1.2 120.933,87.042 C2.2
NetD1_K: D1.K J1.3 R3.2 | length 11.3
  Top Layer w0.3: R3.2 118.681,114.109 D1.K 118.745,115.951 120.65,117.856 120.65,120.014 J1.3@120.412,120.252
NetD2_K: D2.K J1.2 R1.2 R2.1 | length 15.3
  Top Layer w0.3: D2.K 124.144,114.044 R1.2 ; J1.2@122.412,120.252 122.682,119.982 122.682,116.713 124.46,114.935 R1.2 ; R2.1 127.381,111.76 126.873,112.268 124.968,112.268 124.46,112.776 R1.2
NetD3_1: D3.1 R9.1 | length 3.7
  Top Layer w0.3: R9.1 D3.1
NetD3_2: D3.2 U3.23 | length 11.8
  Top Layer w0.3: D3.2 94.361,92.329 95.123,93.091 100.33,93.091 101.568,91.853 U3.23
NetD4_1: D4.1 R10.1 | length 3.8
  Top Layer w0.3: R10.1 97.409,87.277 D4.1
NetD4_2: D4.2 U3.24 | length 6.4
  Top Layer w0.3: D4.2 103.678,90.904 U3.24
NetLS1_1: LS1.1 LS1.1A U2.24 | length 8.5
  Top Layer w0.3: U2.24 101.213,116.084 102.622,114.675 LS1.1
NetLS1_2: LS1.2 LS1.2A R12.2 | length 22.9
  Top Layer w0.3: LS1.2 107.84,126.475 109.855,124.46 109.855,110.109 108.712,108.966 R12.2
NetR4_2: R4.2 S2.1 S2.2 U2.30 | length 32.4
  Top Layer w0.3: S2.1 68.848,128.016 89.662,128.016 92.018,125.66 U2.30
NetR5_2: R5.2 S3.1 S3.2 U2.31 | length 51.4
  Top Layer w0.3: S3.1 54.229,113.088 54.229,115.316 55.753,116.84 69.596,116.84 77.089,124.333 87.059,124.333 ; R5.2 87.059,124.333 ; U2.31 91.218,121.507 88.392,124.333 87.059,124.333
NetR6_2: R6.2 S4.1 S4.2 U2.32 | length 32.8
  Top Layer w0.3: S4.1 67.346,114.899 68.271,115.824 70.231,115.824 77.47,123.063 88.519,123.063 90.418,121.164 U2.32
NetR7_2: R7.2 S5.1 S5.2 U2.1 | length 69.8
  Top Layer w0.3: S5.2 54.356,103.886 55.753,102.489 61.468,102.489 ; R7.2 71.692,102.489 61.468,102.489 ; U2.1 89.048,120.375 87.63,121.793 78.359,121.793 74.422,117.856 74.422,112.014 72.517,110.109 66.675,110.109 63.627,107.061 63.627,104.648 61.468,102.489
NetR8_2: R8.2 S7.1 S7.2 U2.2 | length 28.8
  Top Layer w0.3: S7.2 67.473,107.859 68.326,108.712 74.295,108.712 78.359,112.776 81.28,112.776 82.296,113.792 82.296,115.951 83.185,116.84 86.36,116.84 87.916,115.284 U2.2
NetR11_1: R11.1 S6.1 S6.2 U3.29 | length 10.6
  Top Layer w0.3: S6.1 102.765,85.576 103.803,86.614 108.432,86.614 108.477,86.659 U3.29
NetR13_1: R13.1 U3.14 | length 36.7
  Top Layer w0.3: R13.1 v1(83.566,106.426) ; U3.14 v1(106.877,106.229)
  Bottom Layer w0.3: v1(83.566,106.426) 106.68,106.426 v1(106.877,106.229)
NetR14_1: R14.1 U3.15 | length 22
  Top Layer w0.3: R14.1 86.868,99.314 87.503,99.949 105.537,99.949 106.077,99.409 U3.15
NetR15_1: R15.1 U3.17 | length 14.5
  Top Layer w0.3: R15.1 103.06,98.489 103.827,97.722 U3.17
NetS1_1: S1.1 U1.2 | length 7.3
  Top Layer w0.3: U1.2 70.606,81.794 71.755,80.645 S1.1
Programmer_MOSI: R14.2 U2.15 | length 14.4
  Top Layer w0.3: R14.2 86.868,102.616 88.138,103.886 93.472,103.886 95.218,105.632 U2.15
Programmer_SCK: R15.2 U2.17 | length 14.3
  Top Layer w0.3: R15.2 94.805,101.409 97.388,103.992 U2.17
Programmer_SS: R13.2 S6.3 S6.4 U2.14 | length 50.9
  Top Layer w0.3: U2.14 94.418,106.102 93.472,105.156 87.884,105.156 85.09,102.362 85.09,98.68 84.772,98.362 R13.2 83.566,97.155 88.519,92.202 88.519,86.233 92.456,82.296 99.187,82.296 100.457,81.026 100.457,80.264 101.183,79.538 S6.3
USB_D+: R3.1 U3.13 U3.32 | length 27.1
  Top Layer w0.3: U3.32 110.877,92.45 107.677,95.65 U3.13 107.677,103.74 111.506,107.569 113.792,107.569 114.554,108.331 R3.1
USB_D-: R1.1 U3.12 | length 25.1
  Top Layer w0.3: U3.12 108.477,103.016 111.633,106.172 121.412,106.172 124.46,109.22 R1.1
XTAL1: C6.2 U2.7 Y2.2 | length 16.6
  Top Layer w0.3: Y2.2 80.801,118.19 C6.2 v1(86.915,118.19) ; v1(86.963,111.284) U2.7
  Bottom Layer w0.3: v1(86.915,118.19) 86.915,111.332 v1(86.963,111.284)
XTAL2: C5.2 U2.8 Y2.1 | length 11.1
  Top Layer w0.3: Y2.1 80.489,108.378 C5.2 88.058,108.378 89.048,109.368 U2.8
pads on no net: DS1.None U2.9 U2.10 U2.11 U2.12 U2.13 U2.16 U2.19 U2.20 U2.22 U2.23 U2.25 U2.26 U2.29 U3.1 U3.2 U3.9 U3.10 U3.11 U3.16 U3.19 U3.20 U3.22 U3.25 U3.26 U3.27 U3.28 U3.30 U3.31

## Keep-outs
Keep-Out Layer:
  lines w0.3: 52.1,77.5 52.1,134.9 129.5,134.9 129.5,77.5 52.1,77.5

## Silkscreen, mask and mechanical layers (free items; w line width, h text height)
Drill Drawing:
  text ".LEGEND" at 135.88,81.28 h1.52
  text "Drill Drawing." at 135.88,78.74 h1.52

## Dimensions
52.1,77.5 to 52.1,134.9 on Mechanical 1
52.1,77.5 to 129.5,77.5 on Mechanical 1

## Text inside footprints (layer, text, board x,y; h text height)
J1: Mechanical 4 "PCB EDGE" at 115.062,128.143 h1.88